# EAGLE board n64rgb2moutfilter (EAGLE 9.6.2)
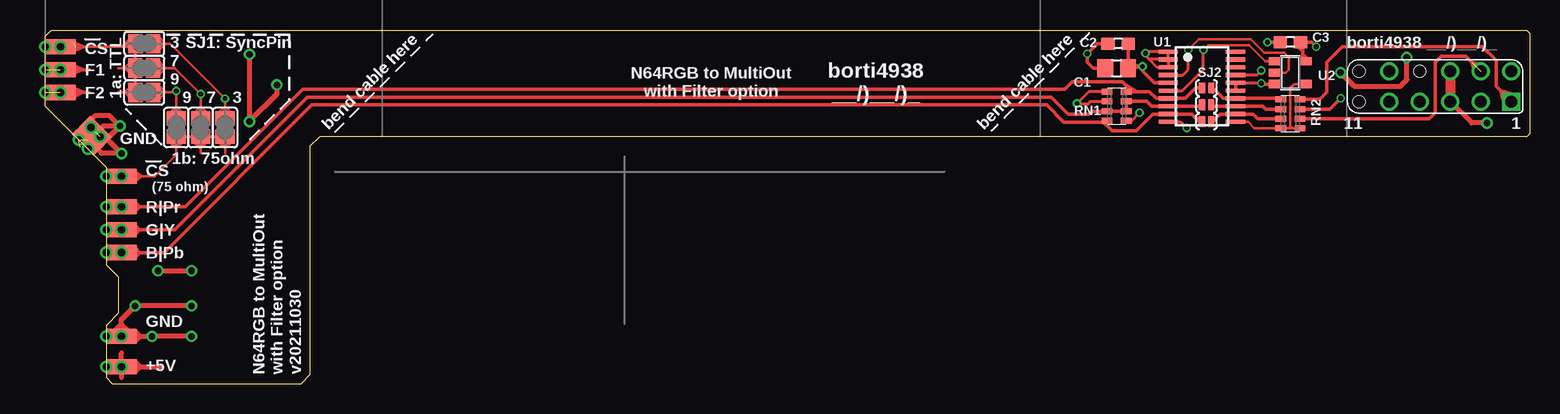
[diagram p0: board, top side]
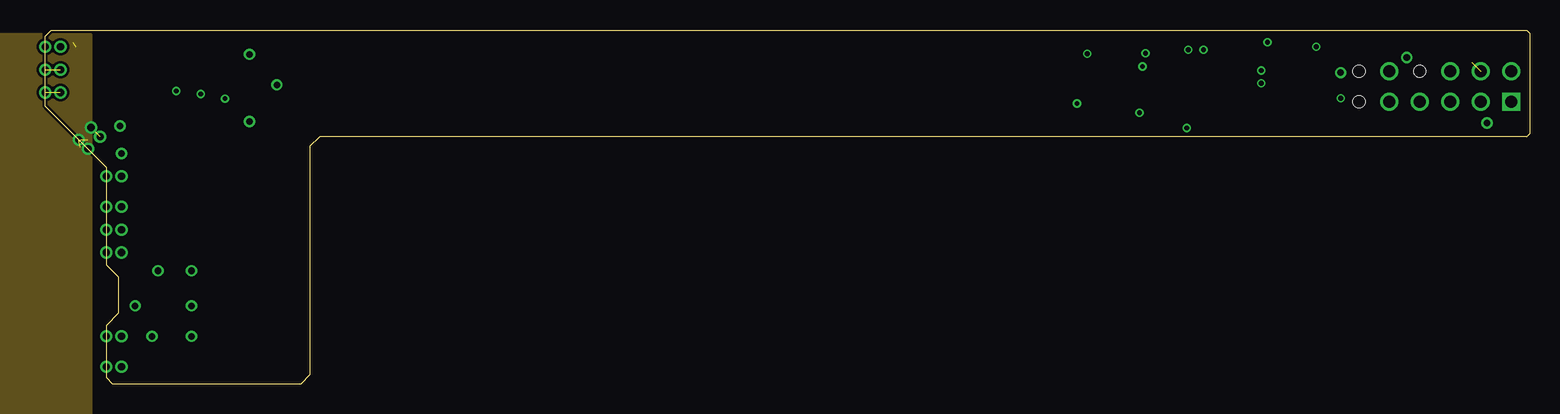
[diagram p1: board, inner layer Route2]
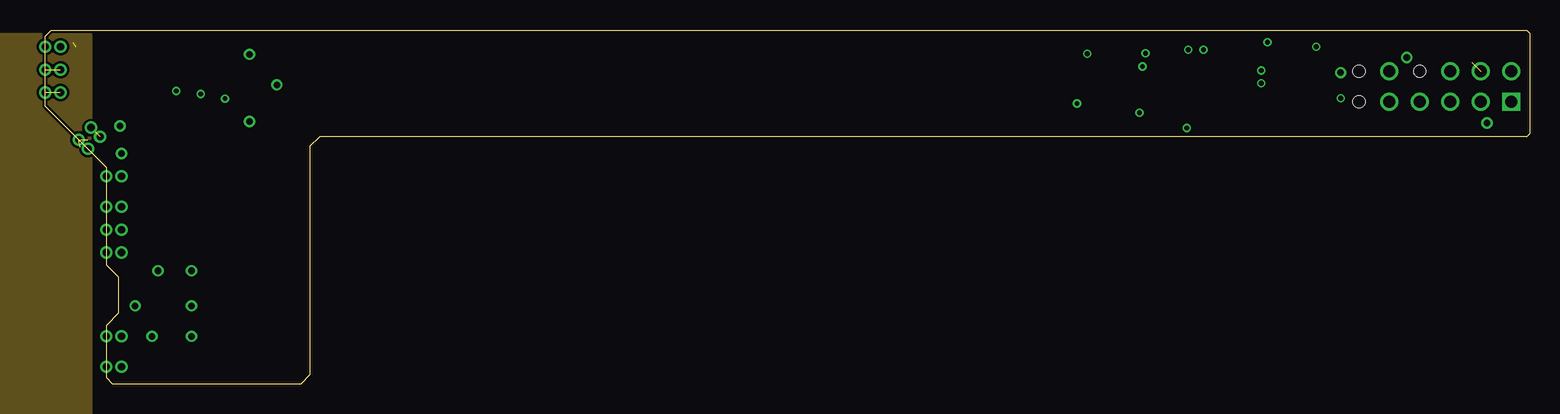
[diagram p2: board, inner layer Route15]
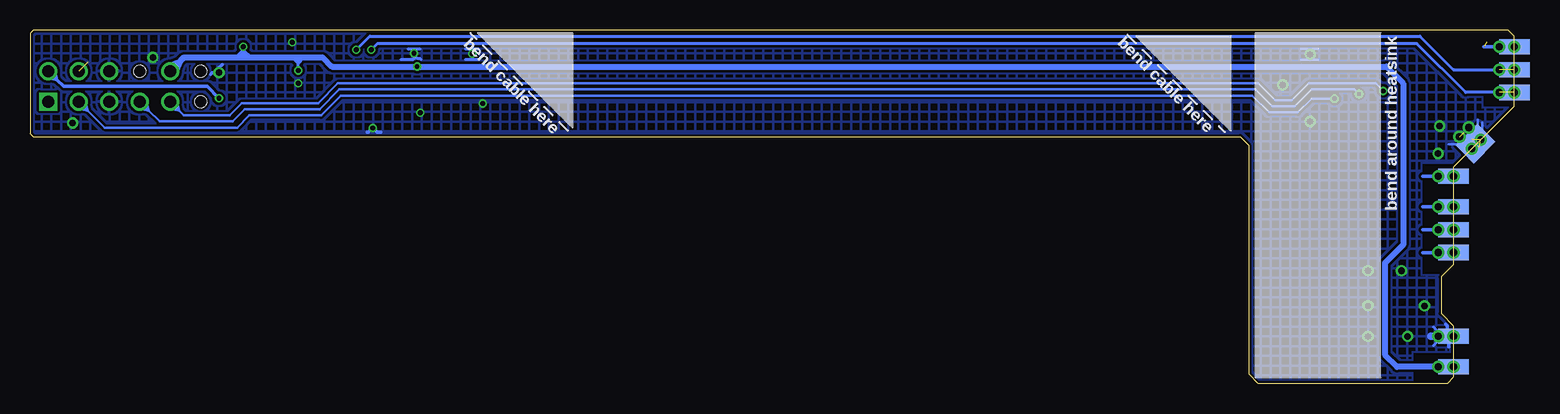
[diagram p3: board, bottom side, seen from below]

Size 123.7 x 29.46 mm. Coordinates in mm from the lower left corner, seen from the top.
Outline: 0,23.11 5.08,18.03 5.08,9.91 6.1,8.89 6.1,5.84 5.08,4.83 5.08,0.51 5.59,0 21.34,0 22.1,0.76 22.1,19.81 22.86,20.57 123.44,20.57 123.7,20.83 123.7,29.21 123.44,29.46 0.51,29.46 0,28.96 0,23.11
Copper layers (1*16): Top 0.018mm / dielectric 1.55mm / Bottom 0.018mm
Design rules "fpc": minimum track width 0.1mm, minimum drill 0.2mm, track to track 0.2mm, track to pad 0.2mm, pad to pad 0.2mm, via to via 0.2mm, smd to smd 0mil, copper to edge 0.2mm, drill to drill 0.2mm, minimum pad ring 0.125mm, minimum via ring 0.1mm, stop-mask expansion 2mil, vias tented up to drill 1mm, thermal gap 0.2mm
bRestrict: area 5.1,-0.3 to 8.4,2.5; area 5.1,9.1 to 7.6,18.3; area 0,23.1 to 2.5,32.3

## Footprints (pad centres in the part's own frame; a part is rotated, then mirrored left to right if it is on the bottom)
SMD1,27-2,54 = smd 1.27 x 2.54: 1 0,0
C0805 = smd 1.3 x 1.5: 1 -0.95,0; 2 0.95,0
C0603 = smd 1.1 x 1: 1 -0.85,0; 2 0.85,0
SNES_MULTIAV_RGBSYFBAS = drill 1 square: 1 6.35,-1.27 | drill 1: 2 6.35,1.27; 3 3.81,-1.27; 4 3.81,1.27; 5 1.27,-1.27; 6 1.27,1.27; 7 -1.27,-1.27; 9 -3.81,-1.27; 10 -3.81,1.27 | hole 1: -6.35,-1.27; -6.35,1.27; -1.27,1.27
SJ = smd 1.168 x 1.6: 1 -0.762,0; 2 0.762,0
CTS742C083 = smd 0.5 x 0.9: 1 -1.2,-0.8; 2 -0.4,-0.8; 3 0.4,-0.8; 4 1.2,-0.8; 5 1.2,0.8; 6 0.4,0.8; 7 -0.4,0.8; 8 -1.2,0.8
SJ_SMALL = smd 0.508 x 0.889: 1 -0.381,0; 2 0.381,0
THS7368 = smd 1.6 x 0.35: 1 -2.8,2.895; 2 -2.8,2.245; 3 -2.8,1.595; 4 -2.8,0.945; 5 -2.8,0.295; 6 -2.8,-0.355; 7 -2.8,-1.005; 8 -2.8,-1.655; 9 -2.8,-2.305; 10 -2.8,-2.955; 11 2.8,-2.955; 12 2.8,-2.305; 13 2.8,-1.655; 14 2.8,-1.005; 15 2.8,-0.355; 16 2.8,0.295; 17 2.8,0.945; 18 2.8,1.595; 19 2.8,2.245; 20 2.8,2.895
SOT23-5 = smd 0.69 x 0.99: 1 -0.95,-1.29; 2 0,-1.29; 3 0.95,-1.29; 4 0.95,1.3; 5 -0.95,1.3

## Placement (x,y rotation side)
B/PB  [SMD1,27-2,54]  6.35,10.92 90 top
B/PB1  [SMD1,27-2,54]  5.08,10.92 90 bottom
C1  22u  [C0805]  89.28,26.29 0 top
C2  0.1u  [C0603]  89.41,28.32 180 top
C3  0.1u  [C0603]  103.76,28.45 180 top
CS75#  [SMD1,27-2,54]  6.35,17.27 90 top
CS75#1  [SMD1,27-2,54]  5.08,17.27 90 bottom
CS#  [SMD1,27-2,54]  0,28.07 90 bottom
CS#1  [SMD1,27-2,54]  1.27,28.07 90 top
E$1  [SNES_MULTIAV_RGBSYFBAS]  115.82,24.77 0 top
E$2  [SJ]  8.26,28.32 0 top
E$3  [SJ]  8.26,26.29 0 top
E$4  [SJ]  8.26,24.26 0 top
E$5  [SJ]  10.92,21.34 90 top
E$6  [SJ]  12.95,21.34 90 top
E$7  [SJ]  14.99,21.34 90 top
F1  [SMD1,27-2,54]  0,26.16 90 bottom
F2  [SMD1,27-2,54]  0,24.26 90 bottom
F3  [SMD1,27-2,54]  1.27,24.26 90 top
F4  [SMD1,27-2,54]  1.27,26.16 90 top
G/Y  [SMD1,27-2,54]  6.35,12.83 90 top
G/Y1  [SMD1,27-2,54]  5.08,12.83 90 bottom
P_GND1  [SMD1,27-2,54]  5.08,3.94 90 bottom
P_GND2  [SMD1,27-2,54]  6.35,3.94 90 top
P_GND3  [SMD1,27-2,54]  4.19,20.96 45 top
P_GND4  [SMD1,27-2,54]  3.56,20.32 45 top
P_GND5  [SMD1,27-2,54]  2.92,19.69 315 bottom
P_GND6  [SMD1,27-2,54]  3.56,20.32 315 bottom
P_VCC_5V  [SMD1,27-2,54]  6.35,1.4 90 top
P_VCC_5V1  [SMD1,27-2,54]  5.08,1.4 90 bottom
R/PR  [SMD1,27-2,54]  6.35,14.73 90 top
R/PR1  [SMD1,27-2,54]  5.08,14.73 90 bottom
RN1  75  [CTS742C083]  89.28,23.11 90 top
RN2  75  [CTS742C083]  103.76,22.48 270 top
SJ2B  [SJ_SMALL]  96.77,24.64 0 top
SJ2G  [SJ_SMALL]  96.77,23.24 0 top
SJ2R  [SJ_SMALL]  96.77,21.84 0 top
U1  [THS7368]  96.39,24.77 0 top
U2  [SOT23-5]  103.76,25.91 270 top

## Library data of the parts
B/PB B/PB1 CS75# CS75#1 CS# CS#1 F1-F4 G/Y G/Y1 P_GND1-P_GND3 P_VCC_5V P_VCC_5V1 R/PR R/PR1 = wirepad@1
C1-C3 = rcl
E$1 U1 = snes_div
E$2-E$7 SJ2B SJ2G SJ2R = jumper
P_GND4-P_GND6 = wirepad
RN1 RN2 = resistor-net
U2 = 74xx-little-de

## Nets
5V: C1.2 C2.1 C3.1 E$1.10 P_VCC_5V1.1 P_VCC_5V.1 U1.5 U1.17 U2.5
#CS: E$1.3 E$2.2 E$7.2
#CS.75.I: CS75#1.1 CS75#.1 E$5.1 E$6.1 E$7.1
#CS.I: CS#1.1 CS#.1 E$2.1 E$3.1 E$4.1
BLUE: B/PB1.1 B/PB.1 RN1.8 SJ2R.1 U1.9
BLUE.OUT: RN2.3 SJ2R.2 U1.12
BLUE.OUT.75: E$1.4 RN2.6
BYPASS_SF: RN2.4 RN2.5 U1.11 U2.4
F1: F1.1 F4.1 U1.6 U2.1
F2: F2.1 F3.1 U1.4 U2.2
FBAS: E$1.9 E$4.2 E$5.2
GND: C1.1 C2.2 C3.2 E$1.5 E$1.6 P_GND1.1 P_GND2.1 P_GND3.1 P_GND4.1 P_GND5.1 P_GND6.1 RN1.1 RN1.5 RN1.6 U1.1 U1.2 U1.3 U1.10 U1.15 U1.16 U2.3
GREEN: G/Y1.1 G/Y.1 RN1.2 RN1.3 RN1.7 SJ2G.1 U1.8
GREEN.OUT: RN2.2 SJ2G.2 U1.13
GREEN.OUT.75: E$1.2 RN2.7
LUMA: E$1.7 E$3.2 E$6.2
RED: R/PR1.1 R/PR.1 RN1.4 SJ2B.1 U1.7
RED1.OUT: RN2.1 SJ2B.2 U1.14
RED.OUT.75: E$1.1 RN2.8

## Tracks (layer width: path | path; a pad name or v marks a point on that pad's centre or on a via)
5V  (via drill 0.4, 0.6)
  Top 0.254: v101.35,26.09 100.97,25.71 U1.17
  Top 0.305: C1.2 90.23,26.47 90.26,26.5 C2.1 | U1.5 92.42,25.06 91.44,26.04 v91.44,26.42 | U2.5 104.78,27.14 104.78,27.43 | 104.78,27.43 104.78,27.69 | 104.78,27.69 104.78,28.28 C3.1 105.54,28.45 v105.92,28.07 | 104.78,27.69 104.27,28.19 | 104.78,27.43 105.28,26.92
  Top 0.406: P_VCC_5V.1 7.87,1.4 | 7.49,1.78 7.87,1.4 | 7.87,1.4 7.49,1.02 | 5.48,1.4 P_VCC_5V.1 | 7.87,1.4 9.53,1.4 | P_VCC_5V.1 6.35,2.54 | P_VCC_5V.1 6.35,0.51 | v91.44,26.42 90.36,26.42 C1.2
  Bottom 0.254: 101.35,26.67 101.35,27.18 | 101.35,26.67 100.84,27.18 | v101.35,26.09 101.35,26.67 | 101.35,26.67 101.85,27.18
  Bottom 0.305: 111,27.05 111.51,25.78 | 111.12,26.92 112.27,26.54 | 106.68,27.18 106.74,27.24 106.81,27.18 | 105.79,27.18 105.92,27.3 v105.92,28.07 105.92,27.79 | 105.92,27.79 106.53,27.18 | 105.92,27.79 105.31,27.18
  Bottom 0.406: P_VCC_5V1.1 P_VCC_5V.1
  Bottom 0.508: P_VCC_5V.1 9.78,1.4 10.79,2.41 10.79,10.03 9.27,11.56 9.27,25.02 10.67,26.42 v91.44,26.42 98.55,26.42 99.31,27.18 100.84,27.18 101.35,27.18 101.85,27.18 105.31,27.18 105.79,27.18 106.53,27.18 106.68,27.18 106.81,27.18 110.87,27.18 111,27.05 111.12,26.92 E$1.10
  other vias: 5.08,1.4 6.35,1.4
#CS  (via drill 0.4)
  Top 0.203: 14.99,23.11 v14.99,23.75 10.41,28.32 10.03,28.32 | 14.99,23.11 14.99,22.86 | 14.99,22.86 E$7.2 | E$2.2 9.78,28.32 | 9.78,28.32 10.03,28.32 | 14.99,23.11 14.48,22.61 14.48,22.35 14.99,22.86 | 14.99,22.86 15.49,22.35 15.49,22.61 14.99,23.11 | 10.03,28.32 9.4,27.69 9.14,27.69 9.78,28.32 | 9.78,28.32 9.4,28.7 | 9.4,28.7 9.14,28.7 | 9.4,28.7 9.65,28.7 | 9.65,28.7 10.03,28.32 | 9.65,28.7 9.53,28.83
  Bottom 0.203: E$1.3 118.87,22.73 | 118.87,22.73 117.47,21.34 106.43,21.34 105.41,22.35 99.44,22.35 97.79,24 21.84,24 20.45,22.61 18.03,22.61 16.89,23.75 v14.99,23.75 | 119.13,23.75 118.87,22.73 | 118.87,22.73 120.02,22.99
#CS.75.I  (via drill 0.6)
  Top 0.203: 8,17.27 9.14,17.27 10.92,19.05 10.92,19.56 | E$5.1 11.43,20.57 | 11.43,20.57 12.32,20.57 | 12.32,20.57 E$6.1 | E$6.1 13.46,20.57 | 13.46,20.57 14.35,20.57 | 14.35,20.57 E$7.1 14.99,20.07 | 11.3,19.94 11.43,20.07 11.43,20.57 | 11.3,19.94 11.18,19.81 | 11.18,19.81 10.92,19.56 | 10.92,19.56 10.92,20.19 | 10.92,20.19 E$5.1 | 10.92,19.56 10.67,19.81 | 10.67,19.81 10.6,19.88 | 10.6,19.88 10.54,19.94 | 10.54,19.94 10.41,20.07 E$5.1 | 10.92,20.19 10.6,19.88 | 10.54,19.94 11.3,19.94 | 11.18,19.81 10.67,19.81 | E$6.1 12.95,19.56 | 12.95,19.18 12.95,19.56 | 14.99,19.69 14.99,19.56 | 14.99,19.18 14.99,19.56 | 12.95,19.56 13.14,19.75 | 13.14,19.75 13.21,19.81 | 13.21,19.81 13.27,19.88 | 13.27,19.88 13.46,20.07 13.46,20.57 | 12.95,19.56 12.76,19.75 | 12.51,20 12.7,19.81 | 12.51,20 12.32,20.19 12.32,20.57 | 12.51,20 12.89,20 | 12.89,20 13.08,20 | 13.08,20 13.14,20 13.21,19.94 | 13.21,19.94 13.27,19.88 | 13.14,19.75 12.76,19.75 | 12.76,19.75 12.7,19.81 | 12.7,19.81 12.89,19.81 13.08,20 | 13.21,19.94 13.21,19.81 | 13.14,19.75 12.89,20 | 14.99,19.56 15.11,19.69 | 15.18,19.75 15.37,19.94 | 15.18,19.75 15.11,19.69 | 15.37,19.94 15.49,20.07 15.49,20.57 14.99,20.07 | 14.99,20.07 14.99,19.94 | 14.99,19.69 14.99,19.94 | 14.99,19.69 15.11,19.69 | 14.99,19.56 14.86,19.69 | 14.8,19.75 14.67,19.88 | 14.67,19.88 14.48,20.07 | 14.48,20.07 14.35,20.19 14.35,20.57 | 14.48,20.07 15.24,20.07 15.37,19.94 | 14.99,19.69 14.86,19.69 | 14.86,19.69 14.8,19.75 | 14.8,19.75 15.18,19.75 | 15.37,19.94 14.99,19.94 | 14.99,19.94 14.73,19.94 14.67,19.88
  Top 0.305: CS75#1.1 CS75#.1 8,17.27 | 7.49,17.65 8,17.27 | 8,17.27 7.49,16.89
  Bottom 0.305: CS75#1.1 7.62,17.27
  other vias: 5.08,17.27 6.35,17.27
#CS.I  (via drill 0.6)  (1 unrouted)
  Top 0.203: 3.17,28.07 6.35,28.07 | 7.11,28.07 7.24,28.07 E$2.1 | 7.11,28.07 6.35,28.07 | 6.6,28.32 6.86,28.58 | 6.86,28.58 7.24,28.96 7.49,28.96 E$2.1 | 6.86,28.58 6.86,28.32 | 6.86,28.32 6.92,28.26 | 6.92,28.26 7.11,28.07 | 6.35,28.07 6.54,28.26 | 6.54,28.26 6.6,28.32 | 6.6,28.32 6.86,28.32 | 6.54,28.26 6.92,28.26 | E$2.1 7.49,26.92 | 7.49,26.92 E$3.1 | E$4.1 7.49,24.77 | 7.49,24.77 7.49,25.78 | 7.49,25.78 E$3.1 | 6.6,24.26 6.1,24.26 | 6.6,26.29 6.1,26.29 | 6.6,26.29 7.24,26.92 7.49,26.92 | 6.6,26.29 6.79,26.1 | 6.79,26.1 7.11,25.78 7.49,25.78 | 6.6,26.29 6.86,26.29 6.99,26.42 7.11,26.29 E$3.1 | 6.6,24.26 7.11,24.77 7.49,24.77 | 6.6,24.26 6.86,24.26 | 6.86,24.26 6.99,24.38 | 6.6,24.26 6.99,23.88 7.37,23.88 | 6.86,24.26 6.86,24.13 6.99,24 | E$3.1 6.99,26.29 6.79,26.1
  Top 0.254: CS#1.1 3.17,28.07
  Top 0.305: 2.29,27.69 3.17,28.07 2.29,28.45
  Bottom 0.203: -0.36,27.71 CS#.1
  Bottom 0.305: CS#.1 2.54,28.07
  other vias: 0,28.07 1.27,28.07
+5V
  pour Route15 (rank 3): -22.86,29.08 -22.86,24.26 -22.1,23.5 -17.02,23.5 -16.51,22.99 -16.51,17.4 -16,16.89 -14.22,16.89 -9.14,11.81 -9.14,8.76 -9.65,8.25 -13.21,8.25 -13.72,7.75 -13.72,1.91 -13.21,1.4 -7.37,1.4 -6.86,0.89 -6.86,-2.92 -6.1,-3.68 3.81,-3.68 3.81,29.08
BLUE  (via drill 0.6)
  Top 0.254: 96.39,22.1 SJ2R.1
  Top 0.305: 7.87,10.92 B/PB.1 B/PB1.1 | 7.49,11.3 7.87,10.92 | 7.87,10.92 7.49,10.54 | 7.87,10.92 9.91,10.92 22.23,23.24 83.44,23.24 84.89,21.79 87.63,21.79 88.07,21.79 88.48,21.5 | 95.89,22.1 95.52,22.46 U1.9 92.31,22.46 90.93,21.08 88.9,21.08 88.48,21.5 | 95.89,22.1 96.39,22.1 | 88.48,21.5 RN1.8 | 95.89,22.1 96.39,21.59
  Bottom 0.305: B/PB1.1 7.62,10.92
  other vias: 5.08,10.92 6.35,10.92
BLUE.OUT
  Top 0.254: 97.16,22.1 SJ2R.2 | 97.54,22.1
  Top 0.305: 97.54,22.1 97.91,22.46 U1.12 100.67,22.46 101.05,22.08 RN2.3 | 97.16,22.1 97.54,22.1 97.16,21.59
BLUE.OUT.75  (1 unrouted)
  Top 0.305: 118.87,26.78 118.36,27.29 116.33,27.29 115.82,26.78 115.82,22.59 115.32,22.08 RN2.6 | 118.87,26.8 E$1.4 | 118.87,26.8 120.02,26.42 | 118.87,26.8 119.25,25.65
BYPASS_SF
  Top 0.203: U1.11 100.24,21.81 100.77,21.28 RN2.4 103.58,21.28 | 103.58,21.28 103.76,21.46 | U2.4 104.08,24.96 103.76,24.64 103.76,21.46 | RN2.5 104.14,21.28 103.94,21.28 | 103.94,21.28 103.76,21.46 | 103.94,21.28 103.58,21.28
F1  (via drill 0.4, 0.6)  (1 unrouted)
  Top 0.203: v96.52,27.81 96.9,28.19 100.33,28.19 101.67,26.86 U2.1
  Top 0.254: F4.1 2.67,26.16 | 2.67,26.16 3.17,26.16 | 3.17,26.16 2.29,25.78 | 3.17,26.16 2.29,26.54 | U1.6 94.77,24.41 96.52,26.16 v96.52,27.81 | 3.17,26.16 3.68,26.16 | 2.67,26.16 2.54,26.04 2.54,26.29
  Bottom 0.254: v96.52,27.81 95.38,28.96 7.87,28.96 5.08,26.16 F1.1
  other vias: 0,26.16
F2  (via drill 0.4, 0.6)  (1 unrouted)
  Top 0.203: v95.25,27.81 96.14,28.7 100.46,28.7 101.6,27.56 103.25,27.56 103.63,27.18 103.63,26.16 103.38,25.91 U2.2
  Top 0.254: F3.1 2.67,24.26 | 2.67,24.26 3.17,24.26 | 3.17,24.26 2.29,24.64 | 3.17,24.26 2.41,23.88 | 3.17,24.26 3.68,24.26 | 2.67,24.26 2.54,24 | 2.67,24.26 2.54,24.38 | 94.29,25.71 U1.4 94.8,25.71 95.25,26.16 v95.25,27.81
  Bottom 0.254: v95.25,27.81 94.74,28.32 8.13,28.32 4.06,24.26 F2.1
  other vias: 0,24.26
FBAS  (via drill 0.4)
  Top 0.203: 10.03,24.26 10.79,24.26 v10.92,24.38 10.92,23.11 | 10.03,24.26 9.78,24.26 | 9.78,24.26 E$4.2 | 10.92,22.86 E$5.2 | 10.92,23.11 11.43,22.61 11.43,22.35 10.92,22.86 | 10.92,22.86 10.92,23.11 | 10.92,23.11 10.41,22.61 10.41,22.35 10.92,22.86 | 10.03,24.26 9.53,23.75 9.27,23.75 | 9.14,23.75 9.27,23.75 | 9.27,23.75 9.78,24.26 | 9.78,24.26 9.4,24.64 | 9.4,24.64 9.14,24.64 | 9.4,24.64 9.65,24.64 10.03,24.26
  Bottom 0.203: E$1.9 111.25,22.73 | 111.25,22.73 110.87,22.35 107.06,22.35 106.05,23.37 99.69,23.37 98.04,25.02 21.34,25.02 19.94,23.62 18.54,23.62 17.14,25.02 11.56,25.02 v10.92,24.38 | 111.51,23.75 111.25,22.73 | 111.25,22.73 112.39,22.99
GND  (via drill 0.4, 0.55, 0.6)  (3 unrouted)
  Top 0.254: U1.10 94.61,21.81 v95.12,21.3 | RN1.1 90.53,21.91 v91.19,22.57 | RN1.5 86.96,24.31 v85.98,23.33 86.92,23.33 87.1,23.51 RN1.6 | v101.35,25.02 101.31,25.06 U1.16 | U1.2 U1.3 92.64,26.36 91.99,27.01 | 91.99,27.01 91.69,27.3 v91.69,27.52 91.84,27.66 U1.1 U1.2 | U1.2 91.99,27.01
  Top 0.305: P_GND2.1 P_GND1.1 | C2.2 87.67,28.32 v86.84,27.49 86.84,26.78 87.33,26.29 C1.1 | U1.16 U1.15 | U2.3 101.41,24.96 v101.35,25.02 | v101.85,28.45 C3.2
  Top 0.406: 7.87,3.94 P_GND2.1 6.35,4.95 | 7.87,3.94 v8.89,3.94 v12.19,3.94 | 6.35,4.95 6.35,5.33 v7.49,6.48 v12.19,6.48 | 6.35,4.95 6.99,4.32 | 6.35,4.95 5.71,4.32 | 7.49,4.32 7.87,3.94 | 7.87,3.94 7.49,3.56 | v6.22,21.46 4.83,21.46 4.57,21.21 v4.57,20.57 | 3.68,20.19 4.7,19.18 v6.35,19.18 4.95,20.57 | 3.68,20.19 P_GND6.1 4.32,20.32 v4.57,20.57 | 4.95,20.57 v4.57,20.57 | v6.22,21.46 5.33,20.57 4.95,20.57 | v6.22,21.46 5.36,22.33 4.17,22.33 3.68,21.84 3.68,20.19 | v9.4,9.4 v12.19,9.4 | v17.02,27.43 v17.02,21.84 19.3,24.13 v19.3,24.89 | v120.14,21.72 118.87,21.72 E$1.5 | v107.95,25.91 109.09,24.77 112.9,24.77 113.46,25.32 v113.46,27.18
  Top 0.813: E$1.6 E$1.5
  Bottom 0.203: 2.67,21.72 2.67,21.21 3.05,20.83 | 3.05,20.83 P_GND6.1 | 5.46,19.94 3.94,19.94 P_GND6.1 | P_GND6.1 3.56,21.46 3.68,21.59 | 4.83,20.32 P_GND6.1 | 3.05,20.83 3.05,21.97 | 16.33,27.89 17.02,27.89 | 17.02,27.89 17.75,27.89 | 16.33,26.98 17.02,26.98 | 17.02,26.98 17.75,26.98 | 17.02,27.89 v17.02,27.43 17.02,26.98
  Bottom 0.254: 6.73,4.7 6.35,4.32 P_GND2.1 6.35,3.56 6.73,3.17 | 91.19,27.86 91.69,27.86 | 91.69,27.86 92.2,27.86 | 92.79,27 91.77,27 91.67,27.1 | 91.42,27.1 91.67,27.1 | 91.36,27.1 91.21,27.1 91.11,27 | 91.69,27.86 v91.69,27.52 91.69,27.13 91.67,27.1 | 86.33,27.86 86.84,27.86 | 86.84,27.86 87.4,27.86 | 86.33,27 86.87,27 | 86.87,27 87.4,27 | 86.84,27.86 v86.84,27.49 86.84,27.03 86.87,27
  Bottom 0.305: P_GND2.1 5.59,3.94 | 5.59,3.94 5.59,4.83 5.71,4.95 | 5.59,3.94 5.46,3.81 5.46,3.05 | 107.7,26.57 107.95,26.32 v107.95,25.91 108.5,25.91 108.62,25.78 | 95.58,20.93 95.5,20.93 v95.12,21.3 94.75,20.93 94.46,20.93
  Bottom 0.406: v4.57,20.57 3.94,19.94 | P_GND5.1 3.43,19.69 v3.56,19.56
  Bottom 0.61: P_GND2.1 6.99,3.94
  other vias: 5.08,3.94 6.35,3.94 2.79,20.32 3.81,21.34
  pour Route2 (rank 2): -62.23,-9.02 3.81,-9.02 3.81,29.08 -62.23,29.08
  pour Bottom (hatched): 0,29.46 123.83,29.46 123.83,17.53 22.1,17.53 22.1,0 5.08,0 5.08,18.03 0,23.11
GREEN  (via drill 0.6)
  Top 0.305: 7.87,12.83 G/Y.1 G/Y1.1 | 7.49,12.45 7.87,12.83 | 7.49,13.21 7.87,12.83 | 7.87,12.83 10.79,12.83 21.84,23.88 83.82,23.88 85.24,22.46 86.96,22.46 87.21,22.71 RN1.7 RN1.2 RN1.3 91.8,23.51 92.21,23.11 U1.8 96.26,23.11 SJ2G.1
  Bottom 0.305: G/Y1.1 7.62,12.83
  other vias: 5.08,12.83 6.35,12.83
GREEN.OUT
  Top 0.305: SJ2G.2 97.16,23.11 U1.13 101.46,23.11 101.69,22.88 RN2.2
GREEN.OUT.75  (via drill 0.4)
  Top 0.305: v107.95,23.77 107.06,22.88 RN2.7
  Bottom 0.254: 122.43,25.53 121.41,25.27 121.67,26.29
  Bottom 0.305: E$1.2 121.41,25.27 120.9,24.77 108.94,24.77 v107.95,23.77
LUMA  (via drill 0.4)
  Top 0.203: E$3.2 9.78,26.29 | 9.78,26.29 10.03,26.29 | 10.03,26.29 10.79,26.29 v12.95,24.13 12.95,23.11 | E$6.2 12.95,22.86 | 12.95,22.86 12.95,23.11 | 12.95,23.11 12.32,22.48 12.57,22.48 12.95,22.86 | 12.95,23.11 13.59,22.48 13.59,22.35 13.46,22.35 12.95,22.86 | 10.03,26.29 9.53,25.78 9.27,25.78 | 9.14,25.78 9.27,25.78 | 9.27,25.78 9.78,26.29 | 9.78,26.29 9.4,26.67 | 9.4,26.67 9.14,26.67 | 9.4,26.67 9.65,26.67 | 9.65,26.67 10.03,26.29 | 9.65,26.67 9.53,26.8 9.4,26.8
  Bottom 0.203: v12.95,24.13 13.34,24.51 16.89,24.51 18.29,23.11 20.19,23.11 21.59,24.51 97.92,24.51 99.57,22.86 105.79,22.86 106.81,21.84 112.9,21.84 113.79,22.73 | 113.79,22.73 E$1.7 | 114.05,23.75 113.79,22.73 | 113.79,22.73 114.94,22.99
RED  (via drill 0.6)
  Top 0.305: 7.87,14.73 R/PR.1 R/PR1.1 | 7.49,14.35 7.87,14.73 | 7.87,14.73 7.49,15.11 | U1.7 92.95,23.76 | 7.87,14.73 11.68,14.73 21.46,24.51 84.96,24.51 85.6,25.15 89.76,25.15 90.03,24.88 | U1.7 95.01,23.76 95.89,24.64 SJ2B.1 | 90.03,24.88 90.08,24.82 RN1.4 90.93,24.31 | U1.7 92.57,23.76 92.02,24.31 90.93,24.31 | 90.03,24.88 90.93,24.31
  Bottom 0.305: R/PR1.1 7.62,14.73
  other vias: 5.08,14.73 6.35,14.73
RED1.OUT
  Top 0.305: 97.54,24.38 98.16,23.76 U1.14 102.88,23.76 RN2.1 | 97.54,24.38 97.16,24.38 SJ2B.2 | 97.54,24.38 97.16,24.77
RED.OUT.75
  Top 0.305: 121.28,24.38 120.9,24.77 120.9,26.92 119.76,28.07 108.08,28.07 106.81,26.8 106.81,24.28 106.21,23.68 RN2.8 | 121.28,24.38 E$1.1 | 121.28,24.38 122.68,24 | 121.28,24.38 121.67,22.99
S$2  (via drill 0.6)
  other vias: 1.27,26.16
S$3  (via drill 0.6)
  other vias: 1.27,24.26
VCCIO
  pour Route15 (rank 4): -52.45,29.08 -52.45,24.26 -49.28,24.26 -49.28,29.08 3.81,29.08 3.81,-9.02 -62.23,-9.02 -62.23,29.08

## Text on the board
tPlace: bend cable here | bend cable here
bPlace: bend cable here | bend cable here
tNames: CS | 3 | SJ1: SyncPin | borti4938 __/)__/)_ | 7 | F1 | SJ2 | 9 | N64RGB to MultiOut / with Filter option | borti4938 / __/)__/)_ | F2 | 1a: TTL | 9 | 7 | 3 | 11 | 1 | GND | 1b: 75ohm | CS | (75 ohm) | R|Pr | G|Y | B|Pb | GND | +5V | N64RGB to MultiOut / with Filter option / v20211030
bNames: bend around heatsink
tDocu: Configuration without Filter: / - close SJ2 / - parts: / o C1: 22uF, SMD0805 (optional) / o RN2: 4x0ohm, SMD1206 / - N64Adv board: leave J1.1 open | Configuration with Filter: / - leave SJ2 open / - parts: / o U1: THS7368, TSSOP20 / o U2: SN74LVC1G08DBV, SOT23-5 / o C1: 22uF, SMD0805 / o C2, C3: 0.1uF, SMD0603 / o RN1,RN2: 4x75ohm, SMD1206 / - N64Adv board: close J1.1 | Flex-PCB (c) 2019 - 2021 Peter Bartmann